# Altium PCB TX_BK9531.PcbDoc (part 1 of 2)
Units mm, origin at the board's own origin, x right, y up, seen from the top; angles counter-clockwise.
Board outline 27.94 x 28.57 mm, 2 copper layers (Top Layer, Bottom Layer); 38 components, 26 nets, 123 pads, 33 vias.
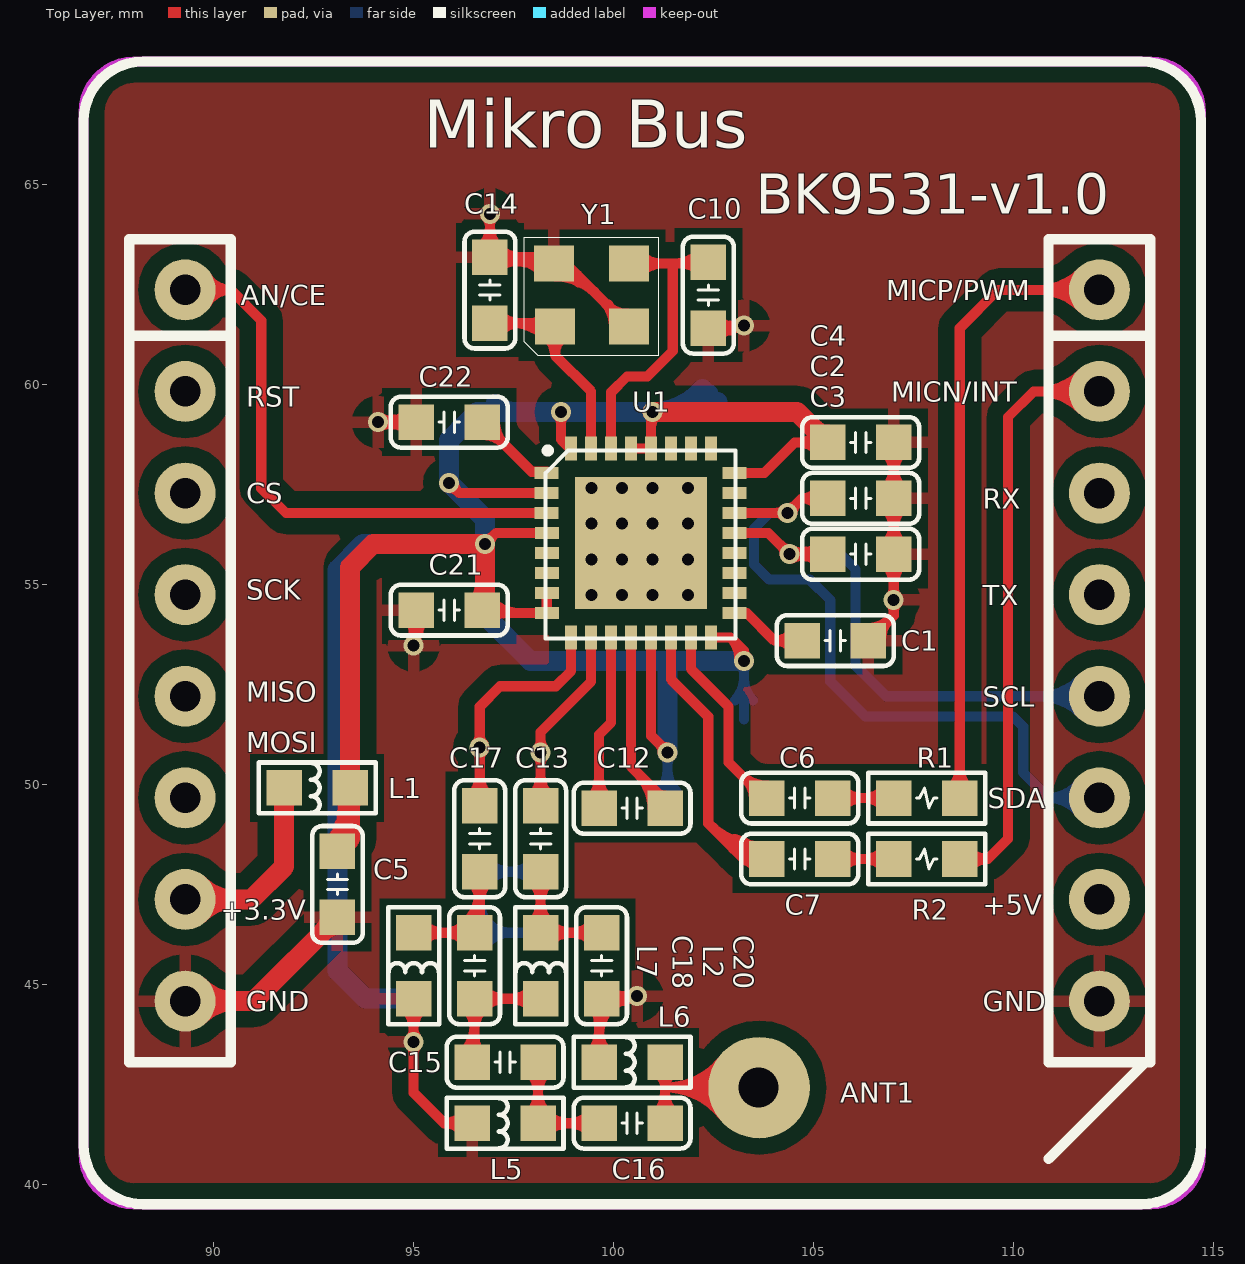
[diagram p0: Top Layer view]
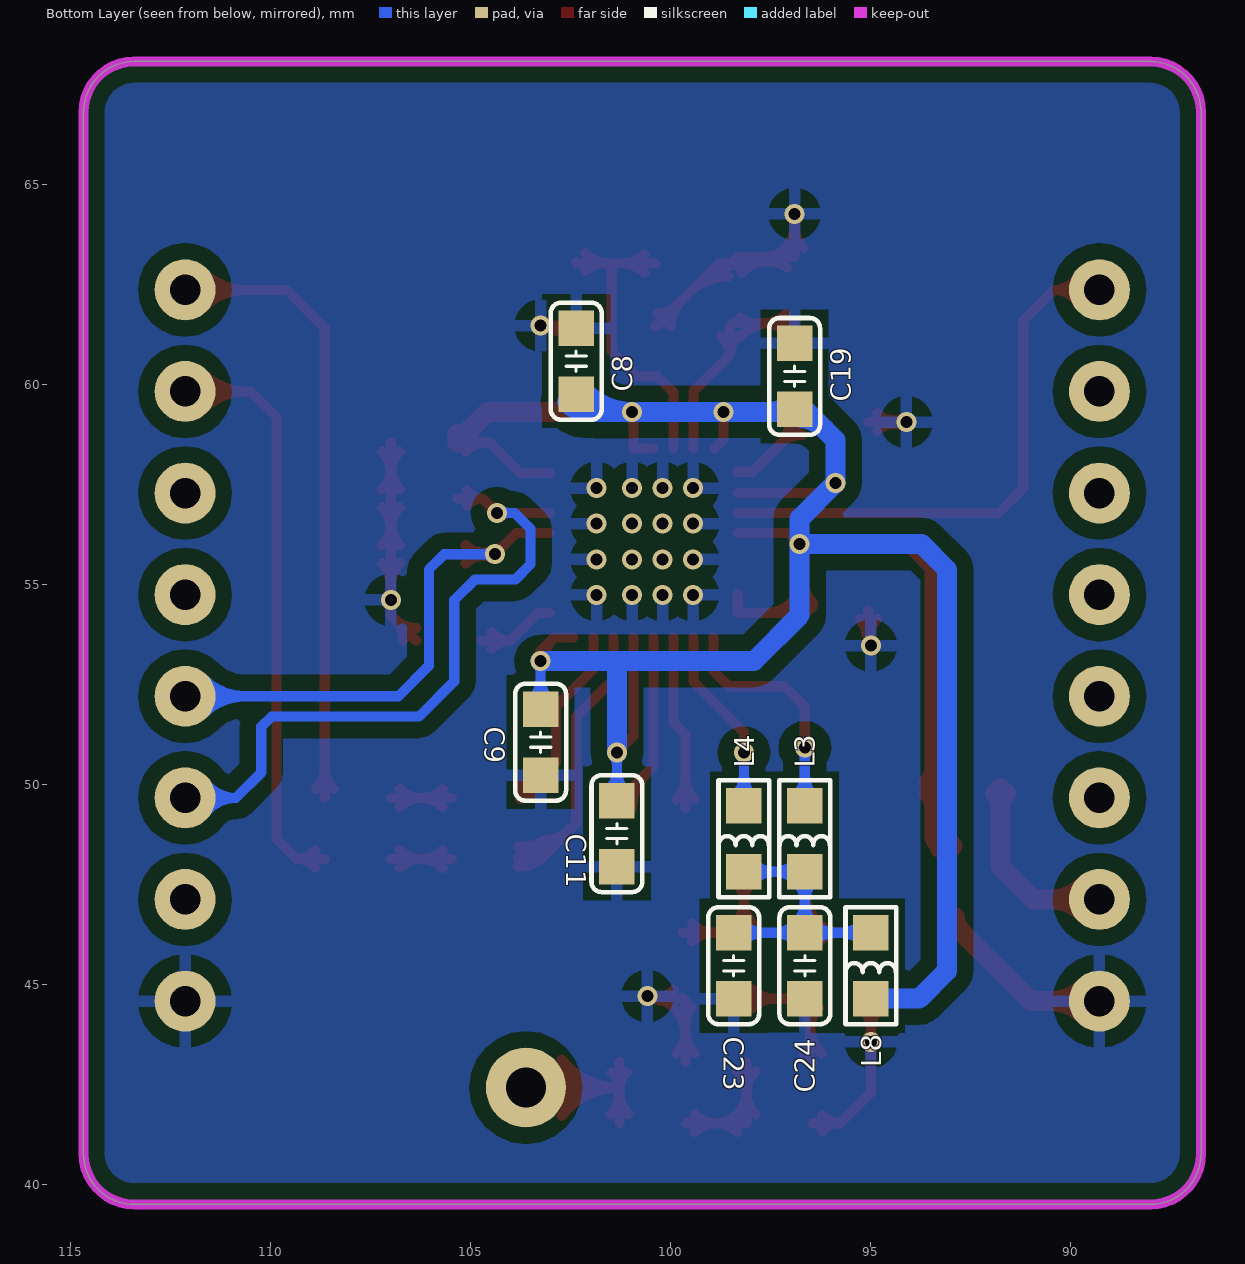
[diagram p1: Bottom Layer view, seen from below]
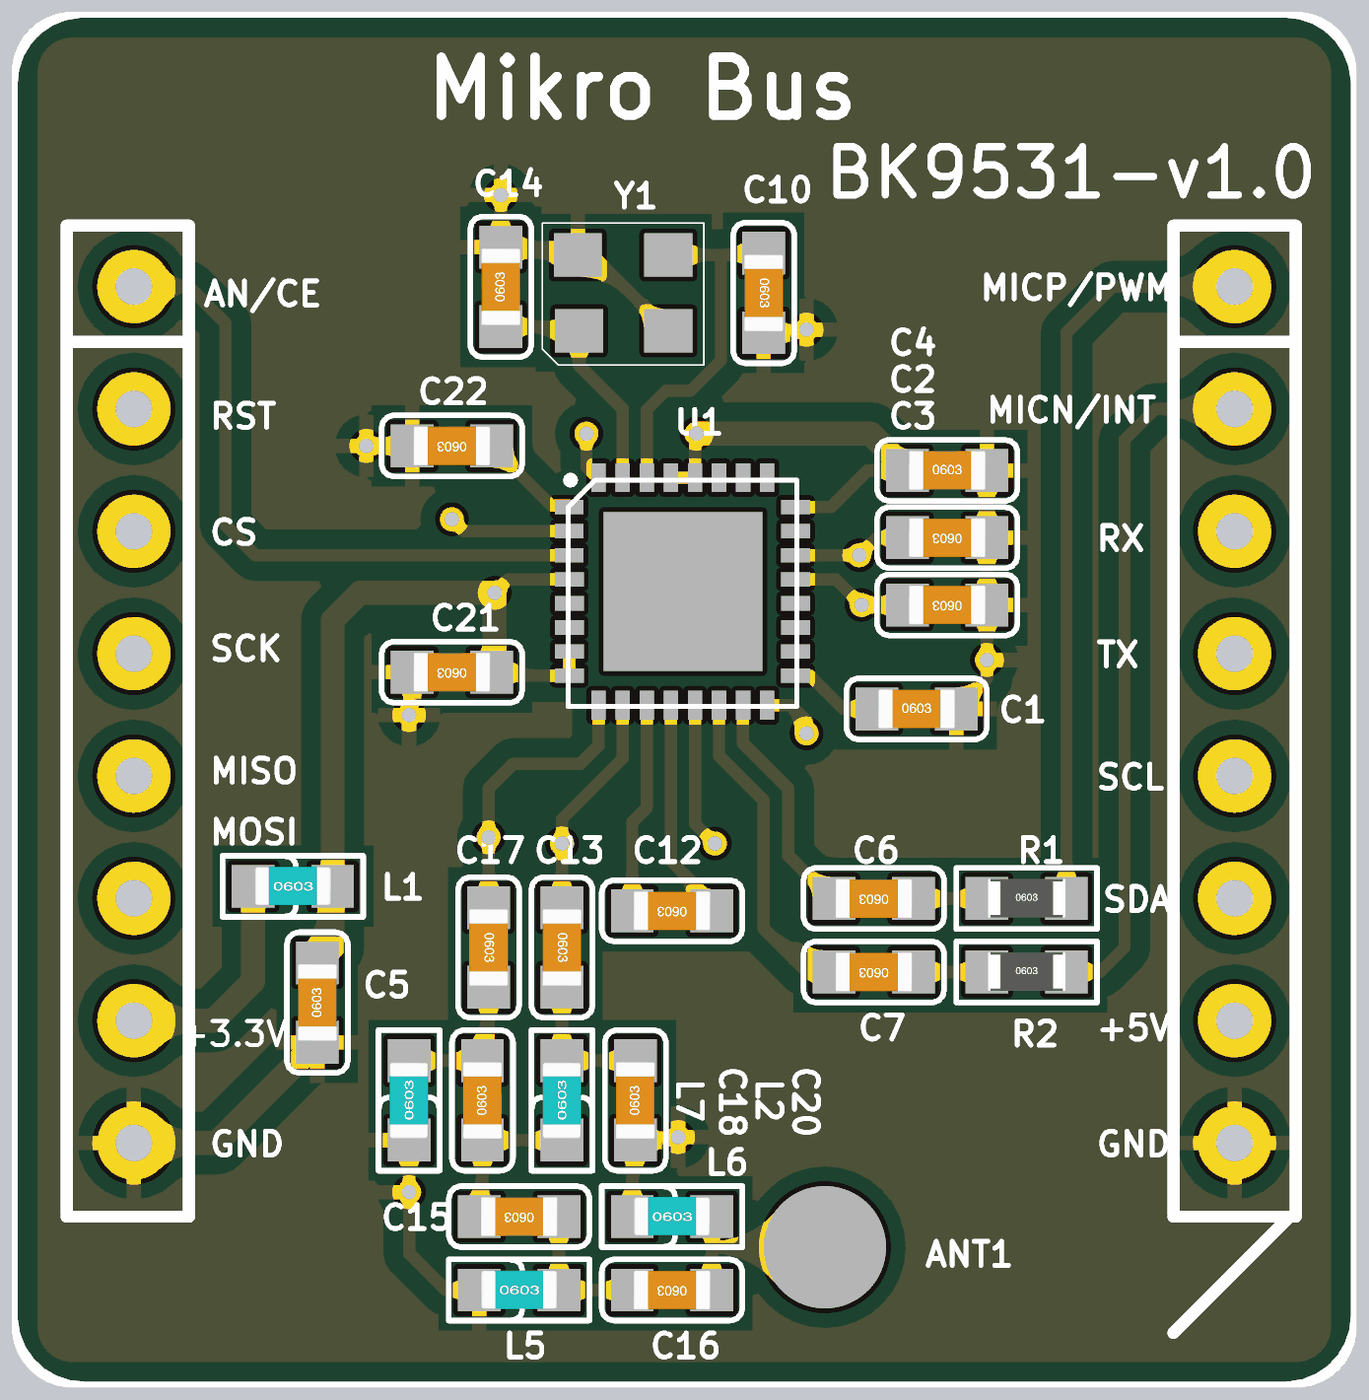
[diagram p3: 3D render of the assembled board from above, using the file's embedded part models]
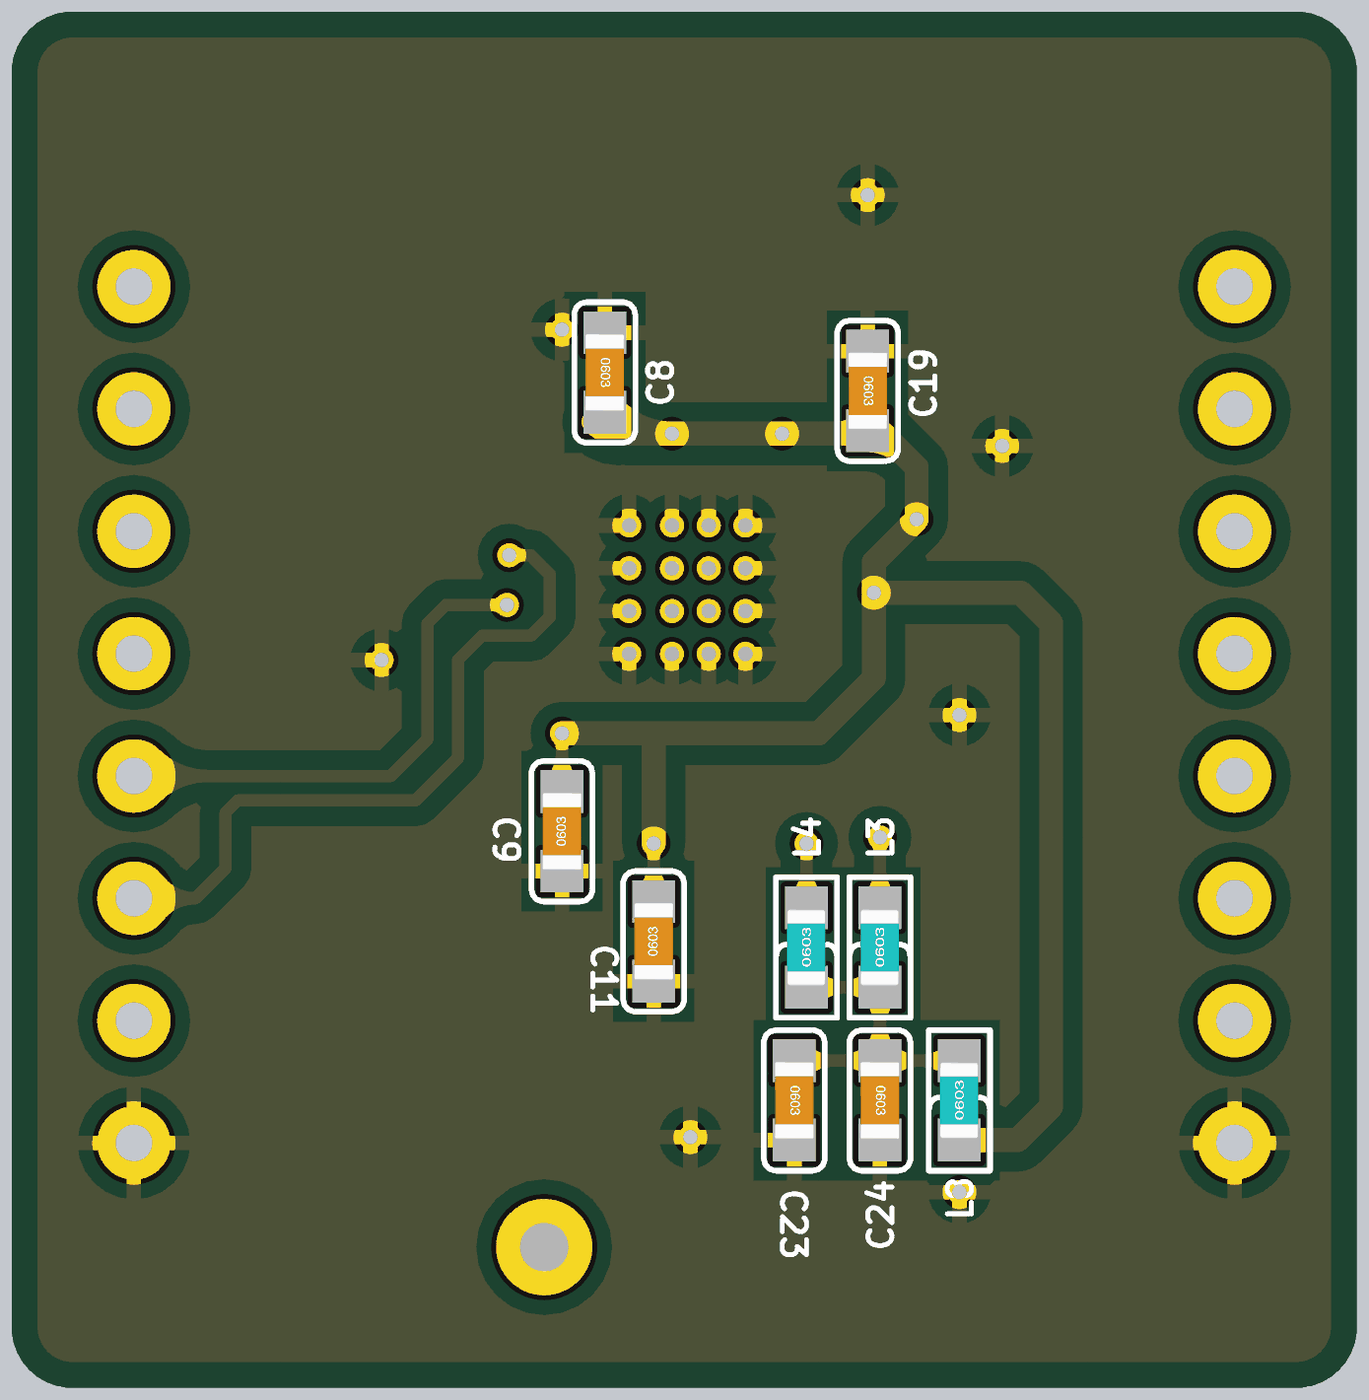
[diagram p4: 3D render of the assembled board from below, using the file's embedded part models]

## Layer stack, top to bottom
Top Layer: signal copper 0.0356
Dielectric: dielectric 0.32, FR-4, Dk 4.8
Bottom Layer: signal copper 0.0356

## Board outline
86.741,40.767 86.741,66.802 cw(c88.011,66.802) 88.011,68.072 113.411,68.072 cw(c113.411,66.802) 114.681,66.802 114.681,40.767 cw(c113.411,40.767) 113.411,39.497 88.011,39.497 cw(c88.011,40.767)

## Design rules (kind name [scope] priority, off if disabled: settings)
Clearance [All] p1: gap=0.4
PolygonConnect [All] p1: connectstyle=Relief reliefconductorwidth=0.3 reliefentries=4 polygonreliefangle="90 Angle"
RoutingVias [All] p1: holewidth=0.711 width=1.27 viastyle="Through Hole" minholewidth=0.3 minwidth=0.3 maxholewidth=0.711 maxwidth=1.27
SilkscreenOverComponentPads SilkToSolderMaskClearance [IsPad] p1: minsilkscreentomaskgap=0.254
SolderMaskExpansion [All] p1: expansion=0.102
Width [All] p1: maxlimit=0.5 minlimit=0.254 preferedwidth=0.254
27 further rules are at their usual default settings.

## Components (designator, comment, footprint, x,y, rotation, side; value= is the part's Value field where it differs from the comment)
ANT1 "弹簧天线" ANT 103.632,42.418 r90 top
C1 "1uF" C0603 105.537,53.594 r0 top
C2 "20pF" C0603 106.172,57.15 r180 top
C3 "20pF" C0603 106.172,55.753 r180 top
C4 "1uF" C0603 106.172,58.547 r0 top
C5 "10uF" C0603 93.091,47.498 r90 top
C6 "10uF" C0603 104.648,49.657 r180 top
C7 "10uF" C0603 104.648,48.133 r180 top
C8 "1uF" C0603 102.362,60.579 r270 bottom
C9 "1uF" C0603 103.251,51.054 r90 bottom
C10 "10pF" C0603 102.362,62.23 r270 top
C11 "2.7uF" C0603 101.346,48.768 r90 bottom
C12 "1uF" C0603 100.457,49.403 r180 top
C13 "100pF" C0603 98.171,48.641 r270 top
C14 "10pF" C0603 96.901,62.357 r90 top
C15 "18pF" C0603 97.282,43.053 r180 top
C16 "*" C0603 100.457,41.529 r180 top
C17 "100pF" C0603 96.647,48.641 r270 top
C18 "2.7pF" C0603 96.52,45.466 r90 top
C19 "1uF" C0603 96.901,60.198 r270 bottom
C20 "2.7pF" C0603 99.695,45.466 r90 top
C21 "1uF" C0603 95.885,54.356 r180 top
C22 "4.7uF" C0603 95.885,59.055 r180 top
C23 "100pF" C0603 98.425,45.466 r270 bottom
C24 "1uF" C0603 96.647,45.466 r270 bottom
L1 "1k@100MHz" L0603 92.583,49.911 r0 top
L2 "18nH" L0603 98.171,45.466 r90 top
L3 "33nH" L0603 96.647,48.641 r90 bottom
L4 "33nH" L0603 98.171,48.641 r90 bottom
L5 "*" L0603 97.282,41.529 r0 top
L6 "*" L0603 100.457,43.053 r0 top
L7 "18nH" L0603 94.996,45.466 r90 top
L8 "1k@100MHz" L0603 94.996,45.466 r90 bottom
R1 "0R" R0603 107.823,49.657 r0 top
R2 "0R" R0603 107.823,48.133 r0 top
U1 "BK9531" QFN32 98.933,57.785 r0 top locked
U2 "MikroBus" MikroBus 86.741,68.072 r0 top locked
Y1 "24.576M" "晶振   有源2520" 99.441,62.23 r0 top

## Footprints (in the part's own frame and the unit in brackets; to place one, negate y for a bottom-side part, rotate by r counter-clockwise, add the part's x,y. Pads: shape width x height; smd on the part's side, far side on the other; paste and mask are expansions set on the pad)
ANT [mm] "弹簧天线"
  round 2.54 smd: 1(0,0)
C0603 [mil] "0603-100nF/25V    104K    贴片层叠电容"
  rect 35x35 smd: 1(-32.5,0) 2(32.5,0)
  silkscreen extent -58,-25 58,25, body extent -31,-16 32,16, height 32
L0603 [mil]
  rect 35x35 smd: 1(-32.5,0) 2(32.5,0)
  silkscreen extent -58,-25 58,25, body extent -31,-15 31,16, height 31
MikroBus [mil] "Mikro Bus General Purpose Module"
  round 60 hole 30: 1(1000,-924.8) 2(1000,-824.8) 3(1000,-724.8) 4(1000,-624.8) 5(1000,-524.8) 6(1000,-424.8) 7(1000,-324.8) 8(1000,-224.8) 9(100,-224.8) 10(100,-324.8) 11(100,-424.8) 12(100,-524.8) 13(100,-624.8) 14(100,-724.8) 15(100,-824.8) 16(100,-924.8)
  silkscreen extent 0,-1125 1100,0
QFN32 [mm] "BK953* 5x5"
  rect 0.6x0.3 smd: 1(-0.61,0) 2(-0.61,-0.5) 3(-0.61,-1) 4(-0.61,-1.5) 5(-0.61,-2) 6(-0.61,-2.5) 7(-0.61,-3) 8(-0.61,-3.5) 17(4.089,-3.5) 18(4.089,-3) 19(4.089,-2.5) 20(4.089,-2) 21(4.089,-1.5) 22(4.089,-1) 23(4.089,-0.5) 24(4.089,0)
  rect 0.3x0.6 smd: 9(0,-4.115) 10(0.5,-4.115) 11(1,-4.115) 12(1.5,-4.115) 13(2,-4.115) 14(2.5,-4.115) 15(3,-4.115) 16(3.5,-4.115) 25(3.5,0.61) 26(3,0.61) 27(2.5,0.61) 28(2,0.61) 29(1.5,0.61) 30(1,0.61) 31(0.5,0.61) 32(0,0.61)
  rect 3.3x3.3 smd: 33(1.753,-1.753)
  silkscreen extent -0.64,-4.14 4.11,0.58
R0603 [mil]
  rect 35x35 smd: 1(-32.5,0) 2(32.5,0)
  silkscreen extent -58,-25 58,25, body extent -31,-15 31,16, height 16
"晶振   有源2520" [mm]
  rect 1x0.9 smd: 1(-0.914,-0.787) 2(0.94,-0.787) 3(0.94,0.787) 4(-0.94,0.787)
  silkscreen extent -1.68,-1.5 1.68,1.45

## Part data
ANT1: library part ANT, "ANT"
C1 C2 C3 C4 C5 C6 C7 C8 C9 C10 C11 C12 C13 C14 C15 C16 C17 C18 C19 C20 C21 C22 C23 C24: library part "CAP 0603-10pF/50V", "0603-10pF/50V 贴片层叠电容"
L1 L2 L3 L4 L5 L6 L7 L8: library part "电感  贴片  33UH", "磁珠"
R1 R2: library part RES1, "1206  K  5%  HS  贴片电阻"
U1: "QFN5x5 32"
Y1: library part "晶振  24.576MHz  49SMD", "（未入库）25.576MHz  49SMD"

## Free pads (board coordinates)
  round 2 hole 1: 0(103.62,42.42)

## Via types
v1: diameter 0.5, hole 0.3, Top Layer to Bottom Layer, 33 vias

## Nets (pads, with @x,y where several pads share a name; then routed paths per layer and width w, separated by ;. In a path a pad name is that pad's centre, name@x,y a point inside that pad or via, vN(x,y) a via of type N, cw(c..) or ccw(c..) an arc to the next point about the centre after c; other vN are vias at no path point)
CE: U1.3 U2.9 | length 16.7
  Top Layer w0.254: U2.9@89.281,62.362 90.419,62.362 ; U1.3@98.323,56.785 91.805,56.785 91.186,57.404 91.186,61.595 90.419,62.362 ; 90.419,62.362 ccw(c90.419,61.66) 89.821,62.029 cw(c90.419,61.66) 90.419,62.362 ; 90.419,62.362 cw(c90.419,63.064) 89.821,62.695 ccw(c90.419,63.064) 90.419,62.362
GND: C1.2 C2.1 C3.1 C4.2 C5.1 C8.1 C9.1 C10.2 C11.1 C14.2 C19.1 C20.1 C21.2 C22.2 C23.2 C24.2 L5.1 L6.1 L7.1 U1.33 U2.1 U2.16 Y1.2 Y1.4 | length 143.7
  Top Layer w0.254: v1(94.107,59.055) C22.2@95.059,59.055 ; L7.1@94.996,44.64 v1(94.996,43.561) 94.996,42.291 95.758,41.529 ; v1(94.996,53.467) 95.059,53.53 C21.2@95.059,54.356 ; L5.1@96.456,41.529 95.758,41.529 ; v1(96.901,64.262) C14.2@96.901,63.182 98.336,63.182 Y1.4@98.501,63.017 98.806,63.017 Y1.2@100.381,61.443 ; L6.1@99.632,43.053 99.632,44.577 C20.1@99.695,44.64 100.52,44.64 v1(100.584,44.704) ; C10.2@102.362,61.404 103.188,61.404 v1(103.251,61.468) ; C1.2@106.362,53.594 106.998,54.229 C3.1@106.998,55.753 C2.1@106.998,57.15 C4.2@106.998,58.547 ; v1@94.169,58.948 cw(c94.399,58.549) 94.519,58.995 ; v1@94.169,58.948 cw(c94.399,58.549) 94.519,58.995 ; v1@94.169,58.948 cw(c94.399,58.549) 94.519,58.995 ; v1@94.169,58.948 cw(c94.399,58.549) 94.519,58.995 ; v1@94.169,58.948 cw(c94.399,58.549) 94.519,58.995 ; v1@94.169,58.948 cw(c94.399,58.549) 94.519,58.995 ; v1@94.169,59.162 ccw(c94.399,59.561) 94.519,59.115 ; v1@94.169,59.162 ccw(c94.399,59.561) 94.519,59.115 ; v1@94.169,59.162 ccw(c94.399,59.561) 94.519,59.115 ; v1@94.169,59.162 ccw(c94.399,59.561) 94.519,59.115 ; v1@94.169,59.162 ccw(c94.399,59.561) 94.519,59.115 ; v1@94.169,59.162 ccw(c94.399,59.561) 94.519,59.115 ; v1@94.194,58.968 cw(c94.404,58.758) 94.404,59.055 ; v1@94.194,58.968 cw(c94.404,58.758) 94.404,59.055 ; v1@94.194,58.968 cw(c94.404,58.758) 94.404,59.055 ; v1@94.194,59.142 ccw(c94.404,59.352) 94.404,59.055 ; v1@94.194,59.142 ccw(c94.404,59.352) 94.404,59.055 ; v1@94.194,59.142 ccw(c94.404,59.352) 94.404,59.055 ; v1@94.293,59.055 ccw(c94.293,59.822) C22.2@94.835,59.28 ; v1@94.293,59.055 cw(c94.293,58.288) C22.2@94.835,58.83 ; v1@94.293,59.055 ccw(c94.293,59.822) C22.2@94.835,59.28 ; v1@94.293,59.055 cw(c94.293,58.288) C22.2@94.835,58.83 ; v1@94.293,59.055 ccw(c94.293,59.822) C22.2@94.835,59.28 ; v1@94.293,59.055 cw(c94.293,58.288) C22.2@94.835,58.83 ; L7.1@94.771,44.416 cw(c94.229,43.874) 94.996,43.874 ; L7.1@94.771,44.416 cw(c94.229,43.874) 94.996,43.874 ; L7.1@94.771,44.416 cw(c94.229,43.874) 94.996,43.874 ; C21.2@94.835,54.131 cw(c94.293,53.589) v1@95.059,53.589 ; C21.2@94.835,54.131 cw(c94.293,53.589) v1@95.059,53.589 ; C21.2@94.835,54.131 cw(c94.293,53.589) v1@95.059,53.589 ; v1@94.909,43.474 cw(c94.699,43.264) 94.996,43.264 ; v1@94.909,43.474 cw(c94.699,43.264) 94.996,43.264 ; v1@94.909,43.474 cw(c94.699,43.264) 94.996,43.264 ; v1@94.909,43.648 ccw(c94.699,43.858) 94.996,43.858 ; v1@94.909,43.648 ccw(c94.699,43.858) 94.996,43.858 ; v1@94.909,43.648 ccw(c94.699,43.858) 94.996,43.858 ; v1@94.909,53.554 ccw(c94.546,53.917) C21.2@95.059,53.917 ; v1@94.909,53.554 ccw(c94.546,53.917) C21.2@95.059,53.917 ; v1@94.909,53.554 ccw(c94.546,53.917) C21.2@95.059,53.917 ; v1@94.917,53.562 ccw(c94.758,53.753) 94.999,53.817 ; v1@94.917,53.562 ccw(c94.758,53.753) 94.999,53.817 ; v1@94.917,53.562 ccw(c94.758,53.753) 94.999,53.817 ; v1@94.917,53.562 ccw(c94.758,53.753) 94.999,53.817 ; v1@94.917,53.562 ccw(c94.758,53.753) 94.999,53.817 ; v1@94.917,53.562 ccw(c94.758,53.753) 94.999,53.817 ; v1@94.935,53.574 ccw(c94.735,53.918) 95.12,53.815 ; v1@94.935,53.574 ccw(c94.735,53.918) 95.12,53.815 ; v1@94.935,53.574 ccw(c94.735,53.918) 95.12,53.815 ; v1@94.935,53.574 ccw(c94.735,53.918) 95.12,53.815 ; v1@94.935,53.574 ccw(c94.735,53.918) 95.12,53.815 ; v1@94.935,53.574 ccw(c94.735,53.918) 95.12,53.815 ; C21.2@94.937,54.063 cw(c94.868,53.897) 95.042,53.85 ; C21.2@94.937,54.063 cw(c94.868,53.897) 95.042,53.85 ; C21.2@94.937,54.063 cw(c94.868,53.897) 95.042,53.85 ; 94.996,43.264 cw(c95.293,43.264) v1@95.083,43.474 ; 94.996,43.264 cw(c95.293,43.264) v1@95.083,43.474 ; 94.996,43.264 cw(c95.293,43.264) v1@95.083,43.474 ; 94.996,43.858 ccw(c95.293,43.858) v1@95.083,43.648 ; 94.996,43.858 ccw(c95.293,43.858) v1@95.083,43.648 ; 94.996,43.858 ccw(c95.293,43.858) v1@95.083,43.648 ; 94.996,43.874 cw(c95.763,43.874) L7.1@95.221,44.416 ; 94.996,43.874 cw(c95.763,43.874) L7.1@95.221,44.416 ; 94.996,43.874 cw(c95.763,43.874) L7.1@95.221,44.416 ; 95.042,53.851 cw(c95.408,53.753) C21.2@95.218,54.081 ; 95.042,53.851 cw(c95.408,53.753) C21.2@95.218,54.081 ; 95.042,53.851 cw(c95.408,53.753) C21.2@95.218,54.081 ; v1@95.059,53.589 cw(c95.826,53.589) C21.2@95.284,54.131 ; v1@95.059,53.589 cw(c95.826,53.589) C21.2@95.284,54.131 ; v1@95.059,53.589 cw(c95.826,53.589) C21.2@95.284,54.131 ; 95.758,41.529 ccw(c95.758,42.139) L5.1@96.217,41.738 ; 95.758,41.529 cw(c95.758,40.919) L5.1@96.217,41.32 ; 95.758,41.529 ccw(c95.758,42.139) L5.1@96.217,41.738 ; 95.758,41.529 cw(c95.758,40.919) L5.1@96.217,41.32 ; 95.758,41.529 ccw(c95.758,42.139) L5.1@96.217,41.738 ; 95.758,41.529 cw(c95.758,40.919) L5.1@96.217,41.32 ; C14.2@96.676,63.407 ccw(c96.134,63.949) 96.901,63.949 ; C14.2@96.676,63.407 ccw(c96.134,63.949) 96.901,63.949 ; C14.2@96.676,63.407 ccw(c96.134,63.949) 96.901,63.949 ; v1@96.814,64.175 cw(c96.604,63.965) 96.901,63.965 ; v1@96.814,64.175 cw(c96.604,63.965) 96.901,63.965 ; v1@96.814,64.175 cw(c96.604,63.965) 96.901,63.965 ; 96.901,63.949 ccw(c97.668,63.949) C14.2@97.126,63.407 ; 96.901,63.949 ccw(c97.668,63.949) C14.2@97.126,63.407 ; 96.901,63.949 ccw(c97.668,63.949) C14.2@97.126,63.407 ; 96.901,63.965 cw(c97.198,63.965) v1@96.988,64.175 ; 96.901,63.965 cw(c97.198,63.965) v1@96.988,64.175 ; 96.901,63.965 cw(c97.198,63.965) v1@96.988,64.175 ; C14.2@97.083,62.922 cw(c97.566,62.232) 97.784,63.046 ; C14.2@97.083,62.922 cw(c97.566,62.232) 97.784,63.046 ; C14.2@97.083,62.922 cw(c97.566,62.232) 97.784,63.046 ; C14.2@97.126,62.958 cw(c97.668,62.416) 97.668,63.182 ; C14.2@97.126,62.958 cw(c97.668,62.416) 97.668,63.182 ; C14.2@97.126,62.958 cw(c97.668,62.416) 97.668,63.182 ; C14.2@97.126,63.407 ccw(c97.668,63.949) 97.668,63.182 ; C14.2@97.126,63.407 ccw(c97.668,63.949) 97.668,63.182 ; C14.2@97.126,63.407 ccw(c97.668,63.949) 97.668,63.182 ; C14.2@97.176,63.341 ccw(c97.555,63.56) 97.442,63.137 ; C14.2@97.176,63.341 ccw(c97.555,63.56) 97.442,63.137 ; C14.2@97.176,63.341 ccw(c97.555,63.56) 97.442,63.137 ; C14.2@97.273,63.182 cw(c97.273,61.839) Y1.4@98.223,62.789 ; C14.2@97.273,63.182 cw(c97.273,61.839) Y1.4@98.223,62.789 ; C14.2@97.273,63.182 cw(c97.273,61.839) Y1.4@98.223,62.789 ; 97.886,63.182 cw(c97.886,62.452) Y1.4@98.402,62.969 ; 97.886,63.182 cw(c97.886,62.452) Y1.4@98.402,62.969 ; 97.886,63.182 cw(c97.886,62.452) Y1.4@98.402,62.969 ; Y1.4@98.551,62.694 cw(c98.551,61.299) 99.538,62.286 ; Y1.4@98.551,62.694 cw(c98.551,61.299) 99.538,62.286 ; Y1.4@98.551,62.694 cw(c98.551,61.299) 99.538,62.286 ; Y1.4@98.551,62.948 cw(c98.551,62.167) 99.104,62.719 ; Y1.4@98.551,62.948 cw(c98.551,62.167) 99.104,62.719 ; Y1.4@98.551,62.948 cw(c98.551,62.167) 99.104,62.719 ; Y1.4@98.614,63.046 ccw(c99.503,63.451) 99.251,62.507 ; Y1.4@98.614,63.046 ccw(c99.503,63.451) 99.251,62.507 ; Y1.4@98.614,63.046 ccw(c99.503,63.451) 99.251,62.507 ; L6.1@99.407,43.278 ccw(c98.865,43.82) 99.632,43.82 ; L6.1@99.407,43.278 ccw(c98.865,43.82) 99.632,43.82 ; L6.1@99.407,43.278 ccw(c98.865,43.82) 99.632,43.82 ; C20.1@99.47,44.416 cw(c99.082,44.027) 99.632,44.027 ; C20.1@99.47,44.416 cw(c99.082,44.027) 99.632,44.027 ; C20.1@99.47,44.416 cw(c99.082,44.027) 99.632,44.027 ; 99.632,43.721 cw(c100.615,43.721) C20.1@99.92,44.416 ; 99.632,43.721 cw(c100.615,43.721) C20.1@99.92,44.416 ; 99.632,43.721 cw(c100.615,43.721) C20.1@99.92,44.416 ; 99.632,43.82 ccw(c100.398,43.82) L6.1@99.856,43.278 ; 99.632,43.82 ccw(c100.398,43.82) L6.1@99.856,43.278 ; 99.632,43.82 ccw(c100.398,43.82) L6.1@99.856,43.278 ; 99.744,62.079 cw(c99.107,61.443) Y1.2@100.008,61.443 ; 99.744,62.079 cw(c99.107,61.443) Y1.2@100.008,61.443 ; 99.744,62.079 cw(c99.107,61.443) Y1.2@100.008,61.443 ; 99.86,61.994 ccw(c100.52,62.17) Y1.2@100.348,61.509 ; 99.86,61.994 ccw(c100.52,62.17) Y1.2@100.348,61.509 ; 99.86,61.994 ccw(c100.52,62.17) Y1.2@100.348,61.509 ; 99.865,61.959 ccw(c100.331,62.425) Y1.2@100.331,61.766 ; 99.865,61.959 ccw(c100.331,62.425) Y1.2@100.331,61.766 ; 99.865,61.959 ccw(c100.331,62.425) Y1.2@100.331,61.766 ; C20.1@99.92,44.416 cw(c100.462,43.874) v1@100.462,44.64 ; C20.1@99.92,44.416 cw(c100.462,43.874) v1@100.462,44.64 ; C20.1@99.92,44.416 cw(c100.462,43.874) v1@100.462,44.64 ; C20.1@99.92,44.865 ccw(c100.462,45.407) v1@100.462,44.64 ; C20.1@99.92,44.865 ccw(c100.462,45.407) v1@100.462,44.64 ; C20.1@99.92,44.865 ccw(c100.462,45.407) v1@100.462,44.64 ; C20.1@99.97,44.482 cw(c100.298,44.292) 100.2,44.658 ; C20.1@99.97,44.482 cw(c100.298,44.292) 100.2,44.658 ; C20.1@99.97,44.482 cw(c100.298,44.292) 100.2,44.658 ; C20.1@99.988,44.763 ccw(c100.154,44.832) 100.201,44.658 ; C20.1@99.988,44.763 ccw(c100.154,44.832) 100.201,44.658 ; C20.1@99.988,44.763 ccw(c100.154,44.832) 100.201,44.658 ; C20.1@100.134,44.64 ccw(c100.134,45.154) v1@100.497,44.791 ; C20.1@100.134,44.64 ccw(c100.134,45.154) v1@100.497,44.791 ; C20.1@100.134,44.64 ccw(c100.134,45.154) v1@100.497,44.791 ; 100.234,44.701 ccw(c100.298,44.942) v1@100.489,44.783 ; 100.234,44.701 ccw(c100.298,44.942) v1@100.489,44.783 ; 100.234,44.701 ccw(c100.298,44.942) v1@100.489,44.783 ; 100.234,44.701 ccw(c100.298,44.942) v1@100.489,44.783 ; 100.234,44.701 ccw(c100.298,44.942) v1@100.489,44.783 ; 100.234,44.701 ccw(c100.298,44.942) v1@100.489,44.783 ; 100.236,44.58 ccw(c100.133,44.965) v1@100.477,44.765 ; 100.236,44.58 ccw(c100.133,44.965) v1@100.477,44.765 ; 100.236,44.58 ccw(c100.133,44.965) v1@100.477,44.765 ; 100.236,44.58 ccw(c100.133,44.965) v1@100.477,44.765 ; 100.236,44.58 ccw(c100.133,44.965) v1@100.477,44.765 ; 100.236,44.58 ccw(c100.133,44.965) v1@100.477,44.765 ; C10.2@102.587,61.18 cw(c103.129,60.638) v1@103.129,61.404 ; C10.2@102.587,61.18 cw(c103.129,60.638) v1@103.129,61.404 ; C10.2@102.587,61.18 cw(c103.129,60.638) v1@103.129,61.404 ; C10.2@102.587,61.629 ccw(c103.129,62.171) v1@103.129,61.404 ; C10.2@102.587,61.629 ccw(c103.129,62.171) v1@103.129,61.404 ; C10.2@102.587,61.629 ccw(c103.129,62.171) v1@103.129,61.404 ; C10.2@102.637,61.246 cw(c102.965,61.056) 102.867,61.422 ; C10.2@102.637,61.246 cw(c102.965,61.056) 102.867,61.422 ; C10.2@102.637,61.246 cw(c102.965,61.056) 102.867,61.422 ; C10.2@102.655,61.527 ccw(c102.821,61.596) 102.868,61.422 ; C10.2@102.655,61.527 ccw(c102.821,61.596) 102.868,61.422 ; C10.2@102.655,61.527 ccw(c102.821,61.596) 102.868,61.422 ; C10.2@102.801,61.404 ccw(c102.801,61.918) v1@103.164,61.555 ; C10.2@102.801,61.404 ccw(c102.801,61.918) v1@103.164,61.555 ; C10.2@102.801,61.404 ccw(c102.801,61.918) v1@103.164,61.555 ; 102.901,61.465 ccw(c102.965,61.706) v1@103.156,61.547 ; 102.901,61.465 ccw(c102.965,61.706) v1@103.156,61.547 ; 102.901,61.465 ccw(c102.965,61.706) v1@103.156,61.547 ; 102.901,61.465 ccw(c102.965,61.706) v1@103.156,61.547 ; 102.901,61.465 ccw(c102.965,61.706) v1@103.156,61.547 ; 102.901,61.465 ccw(c102.965,61.706) v1@103.156,61.547 ; 102.903,61.344 ccw(c102.8,61.729) v1@103.144,61.529 ; 102.903,61.344 ccw(c102.8,61.729) v1@103.144,61.529 ; 102.903,61.344 ccw(c102.8,61.729) v1@103.144,61.529 ; 102.903,61.344 ccw(c102.8,61.729) v1@103.144,61.529 ; 102.903,61.344 ccw(c102.8,61.729) v1@103.144,61.529 ; 102.903,61.344 ccw(c102.8,61.729) v1@103.144,61.529 ; C1.2@106.362,53.911 ccw(c106.362,54.678) 106.905,54.136 ; C1.2@106.362,53.911 ccw(c106.362,54.678) 106.905,54.136 ; C1.2@106.362,53.911 ccw(c106.362,54.678) 106.905,54.136 ; C1.2@106.68,53.594 cw(c107.447,53.594) 106.905,54.136 ; C1.2@106.68,53.594 cw(c107.447,53.594) 106.905,54.136 ; C1.2@106.68,53.594 cw(c107.447,53.594) 106.905,54.136 ; C3.1@106.773,55.528 cw(c106.231,54.986) 106.998,54.986 ; C3.1@106.773,55.528 cw(c106.231,54.986) 106.998,54.986 ; C3.1@106.773,55.528 cw(c106.231,54.986) 106.998,54.986 ; C3.1@106.773,55.978 ccw(c106.231,56.52) 106.998,56.52 ; C3.1@106.773,55.978 ccw(c106.231,56.52) 106.998,56.52 ; C3.1@106.773,55.978 ccw(c106.231,56.52) 106.998,56.52 ; C2.1@106.773,56.925 cw(c106.231,56.383) 106.998,56.383 ; C2.1@106.773,56.925 cw(c106.231,56.383) 106.998,56.383 ; C2.1@106.773,56.925 cw(c106.231,56.383) 106.998,56.383 ; C2.1@106.773,57.375 ccw(c106.231,57.917) 106.998,57.917 ; C2.1@106.773,57.375 ccw(c106.231,57.917) 106.998,57.917 ; C2.1@106.773,57.375 ccw(c106.231,57.917) 106.998,57.917 ; C4.2@106.773,58.322 cw(c106.231,57.78) 106.998,57.78 ; C4.2@106.773,58.322 cw(c106.231,57.78) 106.998,57.78 ; C4.2@106.773,58.322 cw(c106.231,57.78) 106.998,57.78 ; v1@106.911,54.523 cw(c106.701,54.313) 106.998,54.313 ; v1@106.911,54.523 cw(c106.701,54.313) 106.998,54.313 ; v1@106.911,54.523 cw(c106.701,54.313) 106.998,54.313 ; v1@106.911,54.697 ccw(c106.701,54.907) 106.998,54.907 ; v1@106.911,54.697 ccw(c106.701,54.907) 106.998,54.907 ; v1@106.911,54.697 ccw(c106.701,54.907) 106.998,54.907 ; 106.998,54.313 cw(c107.294,54.313) v1@107.084,54.523 ; 106.998,54.313 cw(c107.294,54.313) v1@107.084,54.523 ; 106.998,54.313 cw(c107.294,54.313) v1@107.084,54.523 ; 106.998,54.907 ccw(c107.294,54.907) v1@107.084,54.697 ; 106.998,54.907 ccw(c107.294,54.907) v1@107.084,54.697 ; 106.998,54.907 ccw(c107.294,54.907) v1@107.084,54.697 ; 106.998,54.986 cw(c107.764,54.986) C3.1@107.222,55.528 ; 106.998,54.986 cw(c107.764,54.986) C3.1@107.222,55.528 ; 106.998,54.986 cw(c107.764,54.986) C3.1@107.222,55.528 ; 106.998,56.383 cw(c107.764,56.383) C2.1@107.222,56.925 ; 106.998,56.383 cw(c107.764,56.383) C2.1@107.222,56.925 ; 106.998,56.383 cw(c107.764,56.383) C2.1@107.222,56.925 ; 106.998,56.52 ccw(c107.764,56.52) C3.1@107.222,55.978 ; 106.998,56.52 ccw(c107.764,56.52) C3.1@107.222,55.978 ; 106.998,56.52 ccw(c107.764,56.52) C3.1@107.222,55.978 ; 106.998,57.78 cw(c107.764,57.78) C4.2@107.222,58.322 ; 106.998,57.78 cw(c107.764,57.78) C4.2@107.222,58.322 ; 106.998,57.78 cw(c107.764,57.78) C4.2@107.222,58.322 ; 106.998,57.917 ccw(c107.764,57.917) C2.1@107.222,57.375 ; 106.998,57.917 ccw(c107.764,57.917) C2.1@107.222,57.375 ; 106.998,57.917 ccw(c107.764,57.917) C2.1@107.222,57.375
  Top Layer w0.5: U2.16@89.281,44.582 91.001,44.582 C5.1@93.091,46.672 ; U2.16@89.643,44.22 cw(c90.517,43.346) 90.517,44.582 ; U2.16@89.643,44.22 cw(c90.517,43.346) 90.517,44.582 ; U2.16@89.643,44.22 cw(c90.517,43.346) 90.517,44.582 ; U2.16@89.643,44.944 ccw(c90.517,45.818) 90.517,44.582 ; U2.16@89.643,44.944 ccw(c90.517,45.818) 90.517,44.582 ; U2.16@89.643,44.944 ccw(c90.517,45.818) 90.517,44.582 ; C5.1@92.759,46.34 ccw(c92.427,46.672) C5.1@92.896,46.672 ; C5.1@92.759,46.34 cw(c93.091,46.008) C5.1@93.091,46.478 ; C5.1@92.759,46.34 ccw(c92.427,46.672) C5.1@92.896,46.672 ; C5.1@92.759,46.34 cw(c93.091,46.008) C5.1@93.091,46.478 ; C5.1@92.759,46.34 ccw(c92.427,46.672) C5.1@92.896,46.672 ; C5.1@92.759,46.34 cw(c93.091,46.008) C5.1@93.091,46.478
  other v1: 106.998,54.61 99.441,54.737 100.203,54.737 100.965,54.737 101.854,54.737 99.441,55.626 100.203,55.626 100.965,55.626 101.854,55.626 99.441,56.515 100.203,56.515 100.965,56.515 101.854,56.515 99.441,57.404 100.203,57.404 100.965,57.404 101.854,57.404
MICN: R2.2 U2.7 | length 25.3
  Top Layer w0.254: R2.2@108.648,48.133 109.347,48.133 ; U2.7@112.141,59.822 110.495,59.822 109.855,59.182 109.855,48.641 109.347,48.133 ; R2.2@108.888,47.924 cw(c109.347,47.523) 109.347,48.133 ; R2.2@108.888,47.924 cw(c109.347,47.523) 109.347,48.133 ; R2.2@108.888,47.924 cw(c109.347,47.523) 109.347,48.133 ; R2.2@108.888,48.342 ccw(c109.347,48.743) 109.347,48.133 ; R2.2@108.888,48.342 ccw(c109.347,48.743) 109.347,48.133 ; R2.2@108.888,48.342 ccw(c109.347,48.743) 109.347,48.133 ; 110.608,59.822 ccw(c110.608,61.355) 111.692,60.271 cw(c110.608,61.355) 110.608,59.822 ; 110.608,59.822 cw(c110.608,58.289) 111.692,59.373 ccw(c110.608,58.289) 110.608,59.822 ; 111.221,59.822 ccw(c111.221,60.742) 111.872,60.091 cw(c111.221,60.742) 111.221,59.822 ; 111.221,59.822 cw(c111.221,58.902) 111.872,59.553 ccw(c111.221,58.902) 111.221,59.822
MICP: R1.2 U2.8 | length 27
  Top Layer w0.254: R1.2@108.648,49.657 108.648,61.404 109.606,62.362 U2.8@112.141,62.362 ; R1.2@108.424,49.882 ccw(c107.882,50.424) 108.648,50.424 ; R1.2@108.424,49.882 ccw(c107.882,50.424) 108.648,50.424 ; R1.2@108.424,49.882 ccw(c107.882,50.424) 108.648,50.424 ; 108.648,50.424 ccw(c109.415,50.424) R1.2@108.873,49.882 ; 108.648,50.424 ccw(c109.415,50.424) R1.2@108.873,49.882 ; 108.648,50.424 ccw(c109.415,50.424) R1.2@108.873,49.882 ; 110.608,62.362 ccw(c110.608,63.895) 111.692,62.811 cw(c110.608,63.895) 110.608,62.362 ; 110.608,62.362 cw(c110.608,60.829) 111.692,61.913 ccw(c110.608,60.829) 110.608,62.362 ; 111.221,62.362 ccw(c111.221,63.282) 111.872,62.631 cw(c111.221,63.282) 111.221,62.362 ; 111.221,62.362 cw(c111.221,61.442) 111.872,62.093 ccw(c111.221,61.442) 111.221,62.362
NetANT1_1: ANT1.1 C16.1 L6.2 pad.0 | length 25.7
  Top Layer w0.254: C16.1@101.282,41.529 101.282,42.418 ; L6.2@101.282,43.053 101.282,42.418 ; ANT1.1@103.632,42.418 101.282,42.418 ; C16.1@101.058,41.754 ccw(c100.516,42.296) 101.282,42.296 ; C16.1@101.058,41.754 ccw(c100.516,42.296) 101.282,42.296 ; C16.1@101.058,41.754 ccw(c100.516,42.296) 101.282,42.296 ; L6.2@101.092,42.799 cw(c100.806,42.418) 101.282,42.418 ; L6.2@101.092,42.799 cw(c100.806,42.418) 101.282,42.418 ; L6.2@101.092,42.799 cw(c100.806,42.418) 101.282,42.418 ; 101.282,42.296 ccw(c102.049,42.296) C16.1@101.507,41.754 ; 101.282,42.296 ccw(c102.049,42.296) C16.1@101.507,41.754 ; 101.282,42.296 ccw(c102.049,42.296) C16.1@101.507,41.754 ; 101.282,42.418 cw(c101.759,42.418) L6.2@101.473,42.799 ; 101.283,42.418 ccw(c101.283,44.261) 102.733,43.123 cw(c101.283,44.261) 101.283,42.418 ; 101.283,42.418 cw(c101.283,40.575) 102.733,41.713 ccw(c101.283,40.575) 101.283,42.418 ; 101.282,42.418 cw(c101.759,42.418) L6.2@101.473,42.799 ; 101.282,42.418 cw(c101.759,42.418) L6.2@101.473,42.799 ; 101.805,42.418 ccw(c101.805,43.851) 102.933,42.967 cw(c101.805,43.851) 101.805,42.418 ; 101.805,42.418 cw(c101.805,40.985) 102.933,41.869 ccw(c101.805,40.985) 101.805,42.418 ; 102.327,42.418 ccw(c102.327,43.442) 103.132,42.81 cw(c102.327,43.442) 102.327,42.418 ; 102.327,42.418 cw(c102.327,41.394) 103.132,42.026 ccw(c102.327,41.394) 102.327,42.418
NetC1_1: C1.1 U1.17 | length 5.1
  Top Layer w0.254: U1.17@103.022,54.285 103.322,54.285 104.013,53.594 ; C1.1@104.712,53.594 104.013,53.594 ; 104.013,53.594 ccw(c104.013,54.204) C1.1@104.472,53.803 ; 104.013,53.594 cw(c104.013,52.984) C1.1@104.472,53.385 ; 104.013,53.594 ccw(c104.013,54.204) C1.1@104.472,53.803 ; 104.013,53.594 cw(c104.013,52.984) C1.1@104.472,53.385 ; 104.013,53.594 ccw(c104.013,54.204) C1.1@104.472,53.803 ; 104.013,53.594 cw(c104.013,52.984) C1.1@104.472,53.385